# Altium PCB OSPLC2_2_IO.PcbDoc (part 2 of 2)
Units mm, origin at the board's own origin, x right, y up, seen from the top; angles counter-clockwise.
Board outline 156 x 86.5 mm, 2 copper layers (Top Layer, Bottom Layer); 296 components, 258 nets, 890 pads, 194 vias.
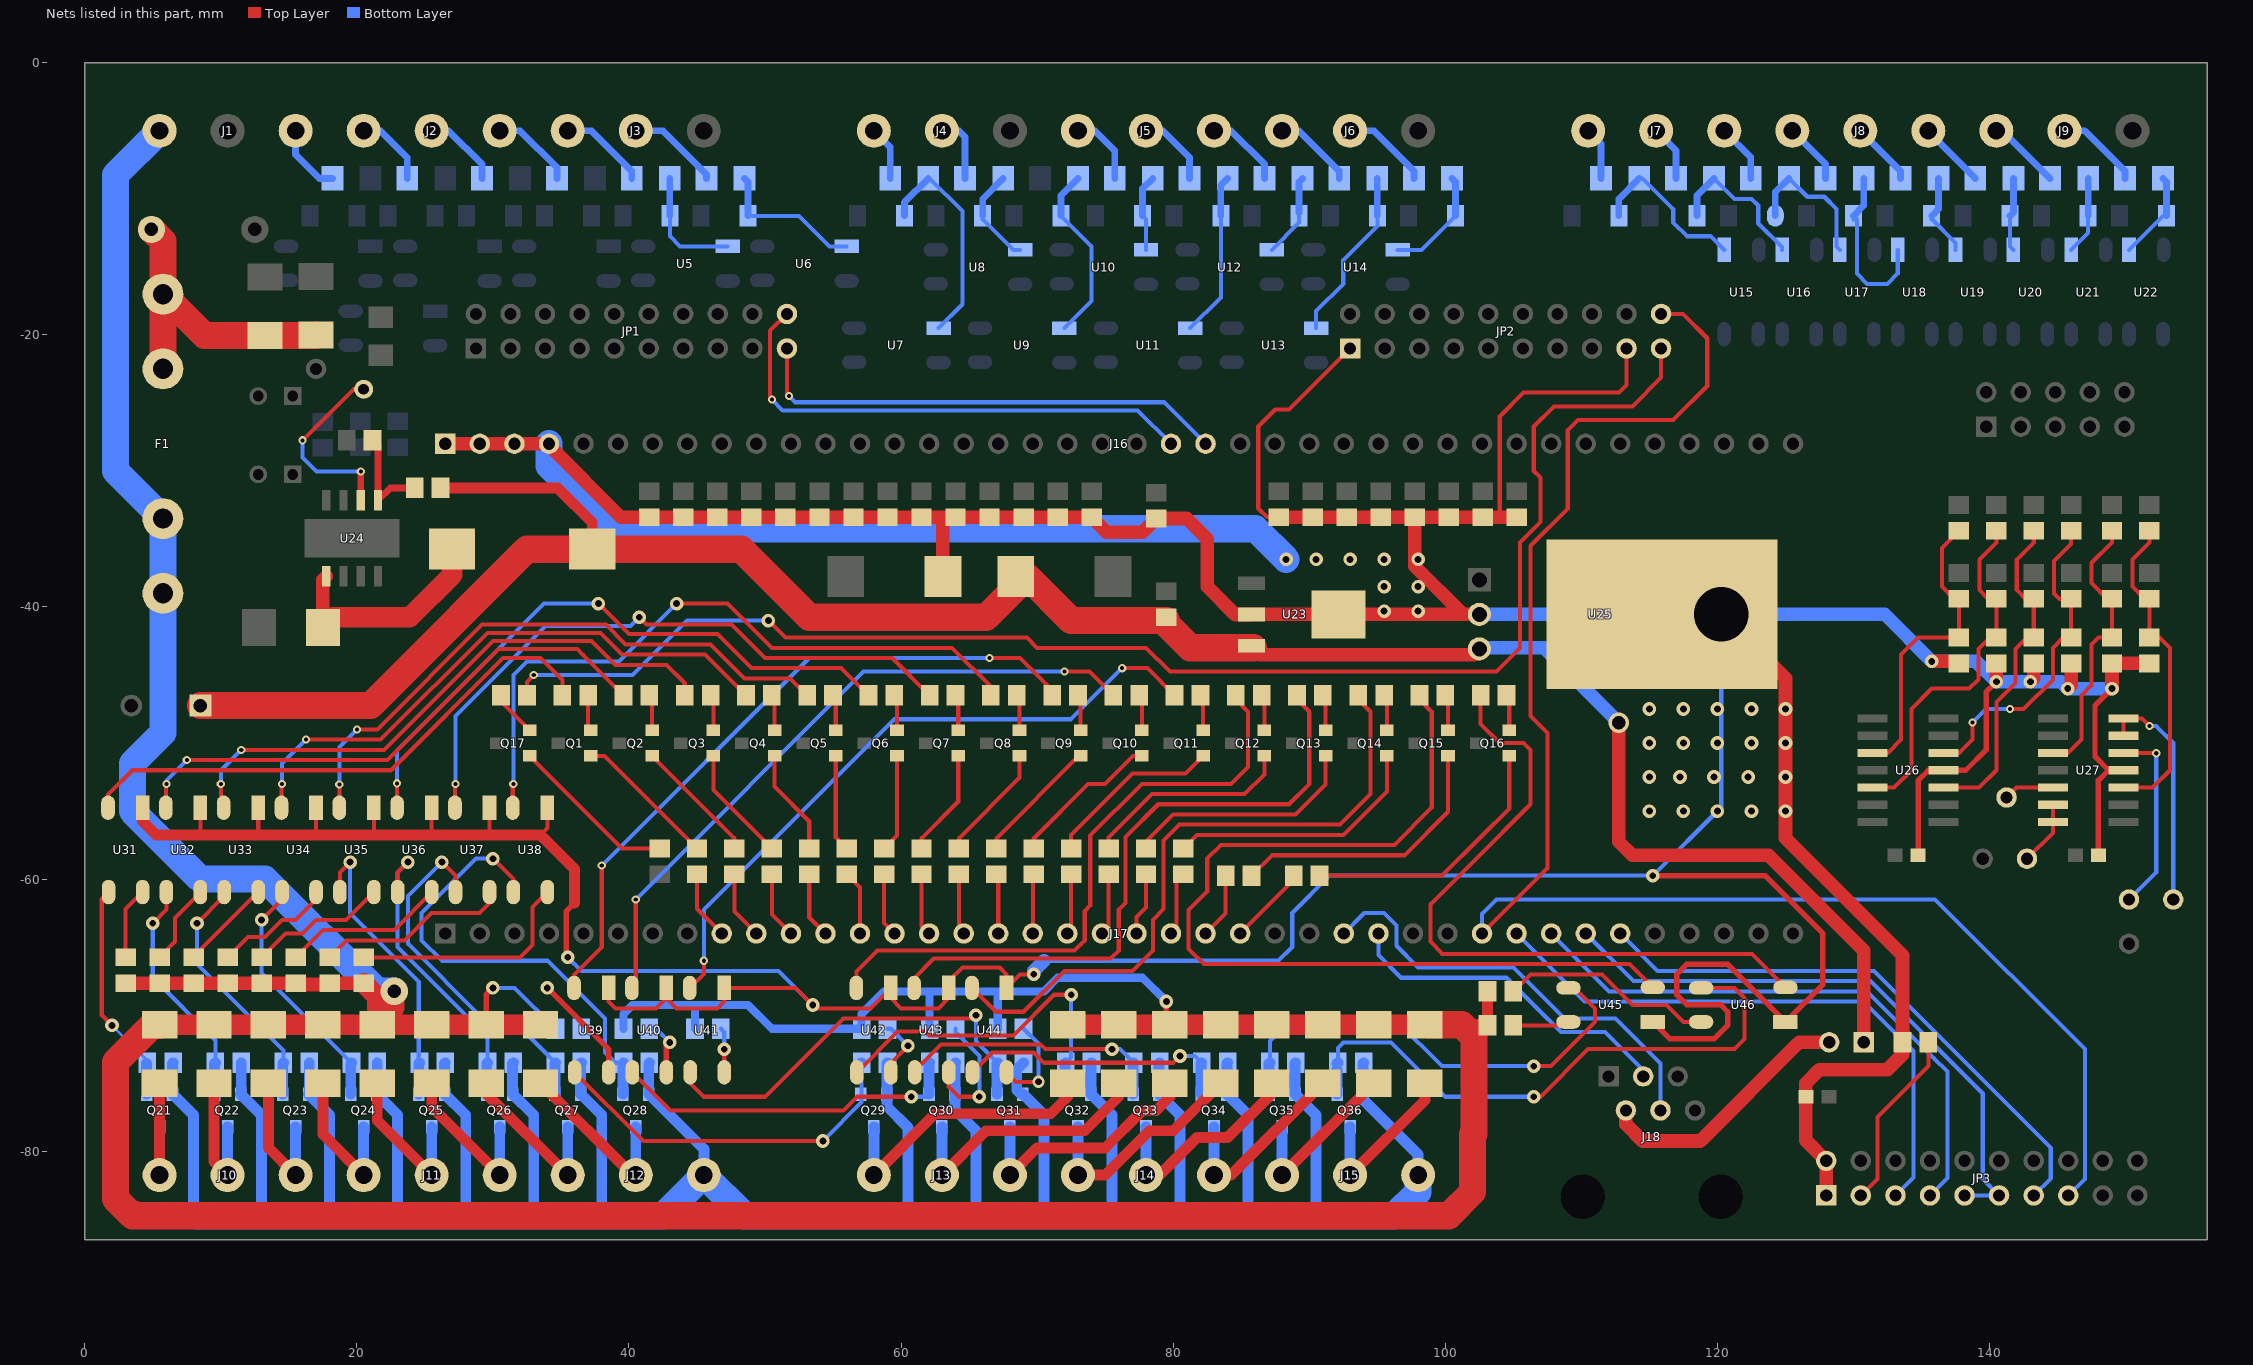
[diagram p2: the nets of this part, all layers, seen from the top]

## Via types
v1: diameter 1, hole 0.5, Top Layer to Bottom Layer, 134 vias
v2: diameter 0.6, hole 0.3, Top Layer to Bottom Layer, 44 vias
v3: diameter 0.9, hole 0.5, Top Layer to Bottom Layer, 8 vias
v4: diameter 1.5, hole 1, Top Layer to Bottom Layer, 6 vias
v5: diameter 1.2, hole 0.6, Top Layer to Bottom Layer, 1 vias
v6: diameter 2, hole 1, Top Layer to Bottom Layer, 1 vias

## Nets (pads, with @x,y where several pads share a name; then routed paths per layer and width w, separated by ;. In a path a pad name is that pad's centre, name@x,y a point inside that pad or via, vN(x,y) a via of type N, cw(c..) or ccw(c..) an arc to the next point about the centre after c; other vN are vias at no path point) (continued)
NetD5_2: D5.2 R5.1 U5.1 | length 8.8
  Bottom Layer w0.3: D5.2@43,-11.25 43,-12.75 43.75,-13.5 U5.1@47.25,-13.5
  Bottom Layer w0.5: D5.2@43,-11.25 R5.1@43,-8.5
NetD6_2: D6.2 R6.1 U6.1 | length 11
  Bottom Layer w0.3: D6.2@48.75,-11.25 52.5,-11.25 54.75,-13.5 U6.1@56,-13.5
  Bottom Layer w0.5: R6.1@48.5,-8.5 48.75,-8.75 D6.2@48.75,-11.25
NetD7_2: D7.2 R7.1 U7.1 | length 16.3
  Bottom Layer w0.3: R7.1@62,-8.5 62.1,-8.5 64.5,-10.9 64.5,-17.75 U7.1@62.75,-19.5
  Bottom Layer w0.5: D7.2@60.25,-11.25 60.25,-10.25 R7.1@62,-8.5
NetD8_2: D8.2 R8.1 U8.1 | length 7.3
  Bottom Layer w0.3: D8.2@66,-11.25 66,-11.5 68.25,-13.75 U8.1@68.75,-13.75
  Bottom Layer w0.5: D8.2@66,-11.25 66,-10 R8.1@67.5,-8.5
NetD9_2: D9.2 R9.1 U9.1 | length 13.3
  Bottom Layer w0.3: D9.2@71.75,-11.25 74,-13.5 74,-17.5 U9.1@72,-19.5
  Bottom Layer w0.5: D9.2@71.75,-11.25 71.75,-9.75 R9.1@73,-8.5
NetD10_2: D10.2 R10.1 U10.1 | length 5.7
  Bottom Layer w0.3: D10.2@77.75,-11.25 78,-11.5 U10.1@78,-13.75
  Bottom Layer w0.5: D10.2@77.75,-11.25 77.75,-9.25 R10.1@78.5,-8.5
NetD11_2: D11.2 R11.1 U11.1 | length 12.1
  Bottom Layer w0.3: U11.1@81.25,-19.5 83.5,-17.25 D11.2@83.5,-11.25
  Bottom Layer w0.5: D11.2@83.5,-11.25 83.5,-9 R11.1@84,-8.5
NetD12_2: D12.2 R12.1 U12.1 | length 6.2
  Bottom Layer w0.3: U12.1@87.25,-13.75 89.25,-11.75 D12.2@89.25,-11
  Bottom Layer w0.5: D12.2@89.25,-11 89.25,-8.75 R12.1@89.5,-8.5
NetD13_2: D13.2 R13.1 U13.1 | length 12.9
  Bottom Layer w0.3: U13.1@90.5,-19.5 90.5,-18.25 92.5,-16.25 92.5,-14.5 95,-12 D13.2@95,-11.25
  Bottom Layer w0.5: D13.2@95,-11.25 R13.1@95,-8.5
NetD14_2: D14.2 R14.1 U14.1 | length 8.1
  Bottom Layer w0.3: U14.1@96.5,-13.75 98.25,-13.75 D14.2@100.75,-11.25
  Bottom Layer w0.5: R14.1@100.5,-8.5 100.75,-8.75 D14.2@100.75,-11.25
NetD15_2: D15.2 R15.1 U15.1 | length 12.4
  Bottom Layer w0.3: R15.1@114.25,-8.5 114.5,-8.5 116.75,-10.75 116.75,-11.75 117.75,-12.75 119.5,-12.75 U15.1@120.5,-13.75
  Bottom Layer w0.5: D15.2@112.75,-11.25 112.75,-10 R15.1@114.25,-8.5
NetD16_2: D16.2 R16.1 U16.1 | length 11.3
  Bottom Layer w0.3: R16.1@119.75,-8.5 121.25,-10 122.5,-10 123,-10.5 123,-11.8 124.75,-13.55 U16.1@124.75,-13.75
  Bottom Layer w0.5: D16.2@118.5,-11.25 118.5,-9.75 R16.1@119.75,-8.5
NetD17_2: D17.2 R17.1 U17.1 | length 10.7
  Bottom Layer w0.3: R17.1@125.25,-8.5 126.6,-9.85 127.85,-9.85 128.75,-10.75 128.75,-13.5 U17.1@129,-13.75
  Bottom Layer w0.5: D17.2@124.25,-11.25 124.25,-9.5 R17.1@125.25,-8.5
NetD18_2: D18.2 R18.1 U18.1 | length 13
  Bottom Layer w0.3: D18.2@130,-11.5 D18.2@130,-11.25 130.25,-11.5 130.25,-15.5 131,-16.25 132.5,-16.25 133.25,-15.5 U18.1@133.25,-13.75
  Bottom Layer w0.5: D18.2@130,-11.25 130.75,-10.5 R18.1@130.75,-8.5
NetD19_2: D19.2 R19.1 U19.1 | length 6.2
  Bottom Layer w0.3: D19.2@135.75,-11.25 135.75,-11.5 137.5,-13.25 U19.1@137.5,-13.75
  Bottom Layer w0.5: D19.2@135.75,-11.25 136.25,-10.75 R19.1@136.25,-8.5
NetD20_2: D20.2 R20.1 U20.1 | length 5.5
  Bottom Layer w0.3: D20.2@141.5,-11.25 141.5,-13.5 U20.1@141.75,-13.75
  Bottom Layer w0.5: D20.2@141.5,-11.25 141.75,-11 R20.1@141.75,-8.5
NetD21_2: D21.2 R21.1 U21.1 | length 5.8
  Bottom Layer w0.3: U21.1@146,-13.75 147.25,-12.5 D21.2@147.25,-11.25
  Bottom Layer w0.5: D21.2@147.25,-11.25 R21.1@147.25,-8.5
NetD22_2: D22.2 R22.1 U22.1 | length 6.6
  Bottom Layer w0.3: U22.1@150.25,-13.75 152.75,-11.25 D22.2@153,-11.25
  Bottom Layer w0.5: R22.1@152.75,-8.5 153,-8.75 D22.2@153,-11.25
NetD23_1: D23.1 D24.2 F1.2 F1.4 M1.2 | length 23.1
  Top Layer w2: M1.2@4.9,-12.25 5.75,-13.1 F1.4@5.75,-22.5 ; F1.2@5.75,-17 8.8,-20.05 16.95,-20.05 D23.1@17,-20
NetD25_1: D25.1 L1.1 U24.1 | length 17.2
  Top Layer w0.5: D25.1@17.5,-41.5 D25.1@17.75,-41.25
  Top Layer w1: D25.1@17.5,-41.5 17.5,-38 U24.1@17.75,-37.75
  Top Layer w1.5: D25.1@17.5,-41.5 18.25,-40.75 23.9,-40.75 27,-37.65 L1.1@27,-35.75
NetJ1_1: J1.1 R1.2 | length 5.2
  Bottom Layer w0.5: J1.1@15.5,-5 15.5,-6.75 17.25,-8.5 R1.2@18.2,-8.5
NetJ2_1: J2.1 R4.2 | length 6.1
  Bottom Layer w0.5: J2.1@30.5,-5 32,-5 34.7,-7.7 R4.2@34.7,-8.5
NetJ2_2: J2.2 R3.2 | length 5.8
  Bottom Layer w0.5: J2.2@25.5,-5 26.75,-5 29.2,-7.45 R3.2@29.2,-8.5
NetJ2_3: J2.3 R2.2 | length 5.6
  Bottom Layer w0.5: J2.3@20.5,-5 21.75,-5 23.7,-6.95 R2.2@23.7,-8.5
NetJ3_2: J3.2 R6.2 | length 6.8
  Bottom Layer w0.5: J3.2@40.5,-5 42.5,-5 45.7,-8.2 R6.2@45.7,-8.5
NetJ3_3: J3.3 R5.2 | length 6.5
  Bottom Layer w0.5: J3.3@35.5,-5 37.25,-5 40.2,-7.95 R5.2@40.2,-8.5
NetJ4_2: J4.2 R8.2 | length 4.9
  Bottom Layer w0.5: J4.2@63,-5 64.25,-5 64.7,-5.45 R8.2@64.7,-8.5
NetJ4_3: J4.3 R7.2 | length 4
  Bottom Layer w0.5: J4.3@58,-5 59.2,-6.2 R7.2@59.2,-8.5
NetJ5_1: J5.1 R12.2 | length 5.8
  Bottom Layer w0.5: J5.1@83,-5 84.25,-5 86.7,-7.45 R12.2@86.7,-8.5
NetJ5_2: J5.2 R11.2 | length 5.6
  Bottom Layer w0.5: J5.2@78,-5 79.25,-5 81.2,-6.95 R11.2@81.2,-8.5
NetJ5_3: J5.3 R10.2 | length 5.4
  Bottom Layer w0.5: J5.3@73,-5 74.25,-5 75.7,-6.45 R10.2@75.7,-8.5
NetJ6_2: J6.2 R14.2 | length 6.5
  Bottom Layer w0.5: J6.2@93,-5 94.75,-5 97.7,-7.95 R14.2@97.7,-8.5
NetJ6_3: J6.3 R13.2 | length 6
  Bottom Layer w0.5: J6.3@88,-5 89.25,-5 92.2,-7.95 R13.2@92.2,-8.5
NetJ7_1: J7.1 R17.2 | length 4.3
  Bottom Layer w0.5: J7.1@120.5,-5 122.45,-6.95 R17.2@122.45,-8.5
NetJ7_2: J7.2 R16.2 | length 4.1
  Bottom Layer w0.5: J7.2@115.5,-5 116.95,-6.45 R16.2@116.95,-8.5
NetJ7_3: J7.3 R15.2 | length 3.9
  Bottom Layer w0.5: J7.3@110.5,-5 111.45,-5.95 R15.2@111.45,-8.5
NetJ8_1: J8.1 R20.2 | length 4.9
  Bottom Layer w0.5: J8.1@135.5,-5 135.5,-5.05 R20.2@138.95,-8.5
NetJ8_2: J8.2 R19.2 | length 4.7
  Bottom Layer w0.5: J8.2@130.5,-5 133.45,-7.95 R19.2@133.45,-8.5
NetJ8_3: J8.3 R18.2 | length 4.5
  Bottom Layer w0.5: J8.3@125.5,-5 127.95,-7.45 R18.2@127.95,-8.5
NetJ9_2: J9.2 R22.2 | length 6.2
  Bottom Layer w0.5: J9.2@145.5,-5 147,-5 149.95,-7.95 R22.2@149.95,-8.5
NetJ9_3: J9.3 R21.2 | length 5.4
  Bottom Layer w0.5: J9.3@140.5,-5 140.95,-5 R21.2@144.45,-8.5
NetJ18_1: 
NetJ18_2: J18.2 JP4.2 | length 19.5
  Top Layer w1: J18.2@113.27,-77 113.27,-78.02 114.5,-79.25 118.75,-79.25 126,-72 JP4.2@128.21,-72
NetJ18_6: 
NetJP3_3: JP3.3 R27.1 | length 13.3
  Top Layer w0.3: JP3.3@130.54,-83.25 131.75,-82.04 131.75,-77.5 135.5,-73.75 R27.1@135.5,-72
NetJP3_17: 
NetJP3_19: 
NetQ1_1: Q1.1 R61.1 | length 10.6
  Top Layer w0.3: Q1.1@37.2,-50.95 38.2,-50.95 R61.1@45,-57.75
NetQ1_2: Q1.2 R121.1 | length 2.6
  Top Layer w0.3: R121.1@37,-46.5 37,-48.85 Q1.2@37.2,-49.05
NetQ2_1: Q2.1 R62.1 | length 9.3
  Top Layer w0.3: Q2.1@41.7,-50.95 47.75,-57 R62.1@47.75,-57.75
NetQ2_2: Q2.2 R122.1 | length 2.6
  Top Layer w0.3: R122.1@41.5,-46.5 41.7,-46.7 Q2.2@41.7,-49.05
NetQ3_1: Q3.1 R63.1 | length 8.6
  Top Layer w0.3: Q3.1@46.2,-50.95 46.2,-53.45 R63.1@50.5,-57.75
NetQ3_2: Q3.2 R123.1 | length 2.6
  Top Layer w0.3: R123.1@46,-46.5 46.2,-46.7 Q3.2@46.2,-49.05
NetQ4_1: Q4.1 R64.1 | length 7.9
  Top Layer w0.3: Q4.1@50.7,-50.95 50.7,-53.2 53.25,-55.75 R64.1@53.25,-57.75
NetQ4_2: Q4.2 R124.1 | length 2.6
  Top Layer w0.3: R124.1@50.5,-46.5 50.7,-46.7 Q4.2@50.7,-49.05
NetQ5_1: Q5.1 R65.1 | length 7.1
  Top Layer w0.3: Q5.1@55.2,-50.95 55.2,-56.95 R65.1@56,-57.75
NetQ5_2: Q5.2 R125.1 | length 2.6
  Top Layer w0.3: R125.1@55,-46.5 55.2,-46.7 Q5.2@55.2,-49.05
NetQ6_1: Q6.1 R66.1 | length 7.2
  Top Layer w0.3: R66.1@58.75,-57.75 59.7,-56.8 Q6.1@59.7,-50.95
NetQ6_2: Q6.2 R126.1 | length 2.6
  Top Layer w0.3: R126.1@59.5,-46.5 59.7,-46.7 Q6.2@59.7,-49.05
NetQ7_1: Q7.1 R67.1 | length 7.9
  Top Layer w0.3: R67.1@61.5,-57.75 61.5,-57 64.2,-54.3 Q7.1@64.2,-50.95
NetQ7_2: Q7.2 R127.1 | length 2.6
  Top Layer w0.3: R127.1@64,-46.5 64.2,-46.7 Q7.2@64.2,-49.05
NetQ8_1: Q8.1 R68.1 | length 8.6
  Top Layer w0.3: R68.1@64.25,-57.75 64.25,-57 68.7,-52.55 Q8.1@68.7,-50.95
NetQ8_2: Q8.2 R128.1 | length 2.6
  Top Layer w0.3: R128.1@68.5,-46.5 68.7,-46.7 Q8.2@68.7,-49.05
NetQ9_1: Q9.1 R69.1 | length 9.7
  Top Layer w0.3: R69.1@67,-57.75 67,-57 73,-51 Q9.1@73.5,-51
NetQ9_2: Q9.2 R129.1 | length 2.6
  Top Layer w0.3: R129.1@73,-46.5 73.2,-46.7 Q9.2@73.2,-49.05
NetQ10_1: Q10.1 R70.1 | length 11.2
  Top Layer w0.3: R70.1@69.75,-57.75 69.75,-57 73.75,-53 75,-53 77.05,-50.95 Q10.1@77.7,-50.95
NetQ10_2: Q10.2 R130.1 | length 2.6
  Top Layer w0.3: R130.1@77.5,-46.5 77.7,-46.7 Q10.2@77.7,-49.05
NetQ11_1: Q11.1 R71.1 | length 13.1
  Top Layer w0.3: R71.1@72.5,-57.75 72.5,-56.75 77,-52.25 80.9,-52.25 Q11.1@82.2,-50.95
NetQ11_2: Q11.2 R131.1 | length 2.6
  Top Layer w0.3: R131.1@82,-46.5 82.2,-46.7 Q11.2@82.2,-49.05
NetQ12_1: Q12.1 R72.1 | length 15.5
  Top Layer w0.3: R72.1@75.25,-57.75 75.25,-56.95 78.45,-53.75 85.25,-53.75 86.7,-52.3 Q12.1@86.7,-50.95
NetQ12_2: Q12.2 R132.1 | length 2.6
  Top Layer w0.3: R132.1@86.5,-46.5 86.7,-46.7 Q12.2@86.7,-49.05
NetQ13_1: Q13.1 R73.1 | length 17.5
  Top Layer w0.3: R73.1@78,-57.75 78,-57.25 80,-55.25 89,-55.25 91.2,-53.05 Q13.1@91.2,-50.95
NetQ13_2: Q13.2 R133.1 | length 2.6
  Top Layer w0.3: R133.1@91,-46.5 91.2,-46.7 Q13.2@91.2,-49.05
NetQ14_1: Q14.1 R74.1 | length 19.3
  Top Layer w0.3: R74.1@80.75,-57.75 81.75,-56.75 92.5,-56.75 95.7,-53.55 Q14.1@95.7,-50.95
NetQ14_2: Q14.2 R134.1 | length 2.6
  Top Layer w0.3: R134.1@95.5,-46.5 95.7,-46.7 Q14.2@95.7,-49.05
NetQ15_1: Q15.1 R75.1 | length 20.5
  Top Layer w0.3: R75.1@85.75,-59.75 87.25,-58.25 97,-58.25 100.2,-55.05 Q15.1@100.2,-50.95
NetQ15_2: Q15.2 R135.1 | length 2.6
  Top Layer w0.3: R135.1@100,-46.5 100.2,-46.7 Q15.2@100.2,-49.05
NetQ16_1: Q16.1 R76.1 | length 21.1
  Top Layer w0.3: R76.1@90.75,-59.75 99.75,-59.75 102.602,-56.898 ; 101.75,-57.75 102.602,-56.898 ; Q16.1@104.7,-50.95 104.7,-54.8 102.602,-56.898
NetQ16_2: Q16.2 R136.1 | length 2.6
  Top Layer w0.3: R136.1@104.5,-46.5 104.7,-46.7 Q16.2@104.7,-49.05
NetQ17_1: Q17.1 R29.1 | length 12.4
  Top Layer w0.3: Q17.1@32.7,-50.95 39.5,-57.75 R29.1@42.25,-57.75
NetQ17_2: Q17.2 R28.2 | length 3.4
  Top Layer w0.3: R28.2@30.6,-46.5 30.6,-46.95 Q17.2@32.7,-49.05
NetQ21_1: Q21.1 R101.2 U31.4 | length 16.5
  Top Layer w0.3: U31.4@1.75,-60.95 1.25,-61.45 1.25,-70 v1(2,-70.75)
  Bottom Layer w0.2: v1(2,-70.75) 4.6,-73.35 R101.2@4.6,-73.5 R101.2@4.55,-73.55
  Bottom Layer w0.8: Q21.1@4.55,-75.8 R101.2@4.55,-73.55
NetQ22_1: Q22.1 R102.2 U32.4 | length 17.2
  Top Layer w0.3: v1(5,-63.25) 6,-62.25 U32.4@6,-60.95
  Bottom Layer w0.3: v1(5,-63.25) 5,-67.25 9.6,-71.85 R102.2@9.6,-73.5
  Bottom Layer w0.8: Q22.1@9.55,-75.8 9.55,-73.55 R102.2@9.6,-73.5
NetQ23_1: Q23.1 R103.2 U33.4 | length 18.3
  Top Layer w0.3: v1(8.25,-63.25) 10.25,-61.25 U33.4@10.25,-60.95
  Bottom Layer w0.3: v1(8.25,-63.25) 8.25,-66.25 14.6,-72.6 R103.2@14.6,-73.5
  Bottom Layer w0.8: Q23.1@14.55,-75.8 14.55,-73.55 R103.2@14.6,-73.5
NetQ24_1: Q24.1 R104.2 U34.4 | length 18.2
  Top Layer w0.3: v1(13,-63) 14.5,-61.5 U34.4@14.5,-60.95
  Bottom Layer w0.3: v1(13,-63) 13,-66.9 R104.2@19.6,-73.5
  Bottom Layer w0.8: Q24.1@19.55,-75.8 19.55,-73.55 R104.2@19.6,-73.5
NetQ25_1: Q25.1 R105.2 U35.4 | length 21.7
  Top Layer w0.3: U35.4@18.75,-60.95 18.75,-59.5 v1(19.5,-58.75)
  Bottom Layer w0.3: v1(19.5,-58.75) 19.5,-62.5 24.55,-67.55 R105.2@24.55,-73.55
  Bottom Layer w0.8: Q25.1@24.55,-75.8 24.55,-73.55 R105.2@24.6,-73.5
NetQ26_1: Q26.1 R106.2 U36.4 | length 22.7
  Top Layer w0.3: U36.4@23,-60.95 23,-59.5 v1(23.75,-58.75)
  Bottom Layer w0.3: v1(23.75,-58.75) 23,-59.5 23,-65 29.6,-71.6 R106.2@29.6,-73.5 R106.2@29.5,-73.5
  Bottom Layer w0.8: Q26.1@29.55,-75.8 29.55,-73.55 R106.2@29.6,-73.5
NetQ27_1: Q27.1 R107.2 U37.4 | length 26.4
  Top Layer w0.3: v1(26.25,-58.75) 27.25,-59.75 U37.4@27.25,-60.95
  Bottom Layer w0.3: v1(26.25,-58.75) 23.75,-61.25 23.75,-64.75 29.25,-70.25 31.35,-70.25 33.495,-72.395 R107.2@34.6,-73.5
  Bottom Layer w0.8: Q27.1@34.55,-75.8 34.55,-73.55 R107.2@34.6,-73.5
NetQ28_1: Q28.1 R108.2 U38.4 | length 34.3
  Top Layer w0.3: v1(30,-58.5) 31.5,-60 U38.4@31.5,-60.95
  Bottom Layer w0.3: v1(30,-58.5) 28.75,-58.5 24.75,-62.5 24.75,-64.5 26.25,-66 34,-66 38.25,-70.25 38.25,-72.75 39,-73.5 R108.2@39.6,-73.5
  Bottom Layer w0.8: Q28.1@39.55,-75.8 39.55,-73.55 R108.2@39.6,-73.5
NetQ29_1: Q29.1 R109.2 U39.4 | length 27.3
  Top Layer w0.3: U39.4@36,-74.2 41.05,-79.25 v1(54.25,-79.25)
  Bottom Layer w0.3: v1(54.25,-79.25) 57.1,-76.4 R109.2@57.1,-73.5
  Bottom Layer w0.8: R109.2@57.05,-73.55 R109.2@57.1,-73.5
NetQ30_1: Q30.1 R110.2 U40.4 | length 25.8
  Top Layer w0.3: U40.4@40.25,-74.2 43.05,-77 55.75,-77 56.75,-76 v1(60.75,-76)
  Bottom Layer w0.3: v1(60.75,-76) 61.85,-76 Q30.1@62.05,-75.8
  Bottom Layer w0.8: Q30.1@62.05,-75.8 62.05,-73.55 R110.2@62.1,-73.5
NetQ31_1: Q31.1 R111.2 U41.4 | length 32.5
  Top Layer w0.3: U41.4@44.5,-74.2 44.5,-75 45.5,-76 50,-76 53.511,-72.489 55.75,-70.25 65.25,-70.25 v1(65.5,-70)
  Bottom Layer w0.3: v1(65.5,-70) 65.5,-71.9 65.743,-72.143 R111.2@67.1,-73.5 66.175,-72.575
  Bottom Layer w0.8: Q31.1@67.05,-75.8 67.05,-73.55 R111.2@67.1,-73.5
NetQ32_1: Q32.1 R112.2 U42.4 | length 25.9
  Top Layer w0.3: U42.4@56.75,-74.2 59.75,-71.2 61.75,-71.2 62.05,-71.5 68.25,-71.5 71.25,-68.5 v1(72.5,-68.5)
  Bottom Layer w0.3: R112.2@72.05,-73.55 72.05,-73.5 R112.2@72.1,-73.5 72.5,-73.1 v1(72.5,-68.5)
  Bottom Layer w0.8: Q32.1@72.05,-75.8 72.05,-73.55 R112.2@72.1,-73.5
NetQ33_1: Q33.1 R113.2 U43.4 | length 19.9
  Top Layer w0.3: U43.4@61,-74.2 61,-74.1 62.95,-72.15 70.25,-72.15 70.6,-72.5 v1(75.5,-72.5)
  Bottom Layer w0.3: v1(75.5,-72.5) 76.1,-72.5 R113.2@77.1,-73.5
  Bottom Layer w0.8: Q33.1@77.05,-75.8 77.05,-73.55 R113.2@77.1,-73.5
NetQ34_1: Q34.1 R114.2 U44.4 | length 20.5
  Top Layer w0.3: U44.4@65.25,-74.2 66.7,-72.75 69.75,-72.75 70.5,-73.5 80,-73.5 v1(80.5,-73)
  Bottom Layer w0.3: v1(80.5,-73) 81.6,-73 R114.2@82.1,-73.5
  Bottom Layer w0.8: Q34.1@82.05,-75.8 82.05,-73.55 R114.2@82.1,-73.5
NetQ35_1: Q35.1 R115.2 U45.4 | length 34.7
  Top Layer w0.3: v1(106.5,-73.75) 107.75,-73.75 111,-70.5 111,-69.5 109.5,-68 U45.4@109.05,-68
  Bottom Layer w0.3: R115.2@87.1,-73.5 87.1,-71.9 88.5,-70.5 96.5,-70.5 99.75,-73.75 v1(106.5,-73.75)
  Bottom Layer w0.8: Q35.1@87.05,-75.8 87.05,-73.55 R115.2@87.1,-73.5
NetQ36_1: Q36.1 R116.2 U46.4 | length 43
  Top Layer w0.3: v1(106.5,-76) 107,-76 110.5,-72.5 121.25,-72.5 122,-71.75 122,-68.75 121.25,-68 U46.4@118.8,-68
  Bottom Layer w0.3: R116.2@92.1,-73.5 92.1,-72.4 92.5,-72 96,-72 97.929,-73.929 100,-76 v1(106.5,-76)
  Bottom Layer w0.8: Q36.1@92.05,-75.8 R116.2@92.05,-74 ; R116.2@92.05,-73.55 R116.2@92.1,-73.5
NetR24_1: R24.1 R26.2 U24.5 | length 7.6
  Top Layer w0.5: R26.2@21.15,-27.75 21.56,-28.16 U24.5@21.56,-32.15 22.46,-31.25 R24.1@24.25,-31.25
NetR30_1: R30.1 R54.2 R56.2 U26.3 | length 24.8
  Top Layer w0.3: U26.3@136.6,-53.27 139.23,-53.27 140.5,-52 140.5,-47 140.7,-46.8 141.9,-45.6 141.9,-43.1 142.75,-42.25 R30.1@143.25,-42.25 R56.2@143.25,-39.4 142.65,-39.4 142,-38.75 142,-36.525 143.25,-35.275 R54.2@143.25,-34.4
NetR53_1: R53.1 R55.2 R57.2 U26.5 | length 24.4
  Top Layer w0.3: U26.5@136.6,-50.73 137.77,-50.73 138.75,-49.75 v2(138.75,-48.5) ; v2(141.5,-47.5) 142.5,-47.5 144.65,-45.35 144.65,-43 145.4,-42.25 R53.1@146,-42.25 R57.2@146,-39.4 145.15,-39.4 144.75,-39 144.75,-36.625 146,-35.375 R55.2@146,-34.4
  Bottom Layer w0.3: v2(138.75,-48.5) 139.75,-47.5 v2(141.5,-47.5)
NetR58_1: R58.1 R60.2 R78.2 U26.10 | length 22.6
  Top Layer w0.3: U26.10@131.4,-50.73 132.52,-50.73 133.5,-49.75 133.5,-43.5 134.75,-42.25 R58.1@137.75,-42.25 R78.2@137.75,-39.4 137.4,-39.4 136.5,-38.5 136.5,-35.65 R60.2@137.75,-34.4
NetR59_1: R59.1 R77.2 R79.2 U26.12 | length 26.8
  Top Layer w0.3: U26.12@131.4,-53.27 132.98,-53.27 134.25,-52 134.25,-47.5 135.75,-46 138.5,-46 139.175,-45.325 139.175,-43.1 140.025,-42.25 R59.1@140.5,-42.25 R79.2@140.5,-39.4 139.9,-39.4 139.25,-38.75 139.25,-36.5 140.5,-35.25 R77.2@140.5,-34.4
NetR80_1: R80.1 R97.2 R98.2 U27.3 | length 23.6
  Top Layer w0.3: U27.3@149.85,-53.27 151.98,-53.27 153.25,-52 153.25,-43 152.5,-42.25 R80.1@151.75,-42.25 ; R80.1@151.75,-42 R98.2@151.75,-39.4 151.4,-39.4 150.5,-38.5 150.5,-36.5 151.75,-35.25 R97.2@151.75,-34.4
NetR81_1: R81.1 U31.6 | length 5.7
  Top Layer w0.3: R81.1@3,-66 R81.1@3.25,-65.75 ; R81.1@3,-65.75 3,-62.2 U31.6@4.25,-60.95
NetR82_1: R82.1 U32.6 | length 6
  Top Layer w0.3: R82.1@5.5,-65.75 6.647,-64.603 6.647,-62.853 8.5,-61 U32.6@8.5,-60.95
NetR83_1: R83.1 U33.6 | length 7.2
  Top Layer w0.3: R83.1@8,-65.75 R83.1@8,-65.25 ; R83.1@8,-65.7 U33.6@12.75,-60.95
NetR84_1: R84.1 U34.6 | length 8.8
  Top Layer w0.3: R84.1@10.5,-65.75 12,-64.25 13.25,-64.25 14.5,-63 15.5,-63 17,-61.5 U34.6@17,-60.95
NetR85_1: R85.1 U35.6 | length 10.2
  Top Layer w0.3: R85.1@13,-65.75 14.75,-64 16,-64 17,-63 19.2,-63 U35.6@21.25,-60.95
NetR86_1: R86.1 U36.6 | length 12.2
  Top Layer w0.3: R86.1@15.5,-65.75 17.5,-63.75 22.75,-63.75 25.5,-61 U36.6@25.5,-60.95 ; U36.6@25.3,-60.45 U36.6@25.5,-60.45
NetR87_1: R87.1 U37.6 | length 14.2
  Top Layer w0.3: R87.1@18,-65.75 19.25,-64.5 23.5,-64.5 25.5,-62.5 29,-62.5 29.75,-61.75 U37.6@29.75,-60.95
NetR88_1: R88.1 U38.6 | length 17.1
  Top Layer w0.3: R88.1@20.5,-65.75 32,-65.75 32.9,-64.85 32.9,-62.05 U38.6@34,-60.95
NetR89_1: R89.1 U39.6 | length 12.1
  Top Layer w0.4: v1(34,-68) 36.36,-70.36 38.5,-72.5 U39.6@38.5,-74.2
  Bottom Layer w0.3: v1(34,-68) 36.5,-70.5 R89.1@36.5,-71
NetR90_1: R90.1 U40.6 | length 4.2
  Top Layer w0.4: U40.6@42.75,-74.2 42.75,-72.25 v1(43,-72)
  Bottom Layer w0.3: R90.1@41.5,-71 42,-71 v1(43,-72)
NetR91_1: R91.1 U41.6 | length 3.3
  Top Layer w0.3: U41.6@47,-74.2 v1(47,-72.5)
  Bottom Layer w0.3: R91.1@46.75,-71 47,-71.25 v1(47,-72.5)
NetR92_1: R92.1 U42.6 | length 4.5
  Top Layer w0.3: U42.6@59.25,-74.2 59.25,-73.5 v1(60.5,-72.25)
  Bottom Layer w0.3: R92.1@59,-71 59.25,-71 v1(60.5,-72.25)
NetR93_1: R93.1 U43.6 | length 9.3
  Top Layer w0.3: U43.6@63.5,-74.2 63.5,-75.25 64.25,-76 v1(65.75,-76)
  Bottom Layer w0.3: R93.1@64,-71 64,-71.25 65.75,-73 v1(65.75,-76)
NetR94_1: R94.1 U44.6 | length 7
  Top Layer w0.3: U44.6@67.75,-74.2 68.45,-74.9 v3(70.1,-74.9)
  Bottom Layer w0.3: R94.1@69,-71 70.1,-72.1 v3(70.1,-74.9)
NetR95_1: R95.1 U45.6 | length 4.2
  Top Layer w0.3: R95.1@105,-70.75 108.8,-70.75 U45.6@109.05,-70.5
NetR96_1: R96.1 U46.6 | length 15.8
  Top Layer w0.3: R96.1@105,-68.25 106.25,-67 111.5,-67 113.75,-69.25 116.25,-69.25 117.5,-70.5 U46.6@118.8,-70.5
NetR99_1: R99.1 R100.2 R117.2 U27.10 | length 20.6
  Top Layer w0.3: U27.10@144.65,-50.73 145.77,-50.73 146.75,-49.75 146.75,-46.5 147.5,-45.75 147.5,-42.75 148,-42.25 R99.1@149,-42.25 ; R99.1@149,-42 R117.2@149,-39.4 148.65,-39.4 147.5,-38.25 147.5,-36.75 149,-35.25 R100.2@149,-34.4
NetR121_2: R121.2 U31.3 | length 40.3
  Top Layer w0.3: U31.3@1.71,-54.75 1.71,-53.79 3.5,-52 22.5,-52 30.75,-43.75 33.5,-43.75 35.1,-45.35 R121.2@35.1,-46.5
NetR122_2: R122.2 U32.3 | length 41.1
  Top Layer w0.3: U32.3@6,-54.71 U32.3@5.96,-54.75 5.96,-53.04 v2(6,-53) ; v2(7.5,-51.25) 22.25,-51.25 30.4,-43.1 36.2,-43.1 36.6,-43.5 R122.2@39.6,-46.5
  Bottom Layer w0.3: v2(6,-53) 6,-52.75 v2(7.5,-51.25)
NetR123_2: R123.2 U33.3 | length 43.1
  Top Layer w0.3: v2(10,-53) 10,-54.54 U33.3@10.21,-54.75 ; v2(11.5,-50.5) 22,-50.5 30,-42.5 37.25,-42.5 39,-44.25 42.75,-44.25 44.1,-45.6 R123.2@44.1,-46.5
  Bottom Layer w0.3: v2(10,-53) 10,-52 v2(11.5,-50.5)
NetR124_2: R124.2 U34.3 | length 43.3
  Top Layer w0.3: U34.3@14.5,-54.71 U34.3@14.46,-54.75 14.46,-53.04 v2(14.5,-53) ; v2(16.25,-49.75) 21.75,-49.75 29.6,-41.9 37.9,-41.9 39.5,-43.5 45.6,-43.5 R124.2@48.6,-46.5
  Bottom Layer w0.3: v2(14.5,-53) 14.5,-51.5 v2(16.25,-49.75)
NetR125_2: R125.2 U35.3 | length 44.9
  Top Layer w0.3: U35.3@18.605,-54.855 U35.3@18.75,-55 ; U35.3@18.71,-54.75 v2(18.71,-53.04) ; v2(20,-49) 21.5,-49 29.2,-41.3 38.3,-41.3 39.75,-42.75 46,-42.75 48.5,-45.25 51.85,-45.25 R125.2@53.1,-46.5
  Bottom Layer w0.3: v2(18.71,-53.04) 18.71,-50.29 v2(20,-49)
NetR126_2: R126.2 U36.3 | length 46.1
  Top Layer w0.3: U36.3@22.96,-54.75 v2(22.96,-52.96) ; v1(37.75,-39.75) 40,-42 46.5,-42 49,-44.5 55.6,-44.5 R126.2@57.6,-46.5
  Bottom Layer w0.3: v2(22.96,-52.96) 22.96,-50.54 33.75,-39.75 v1(37.75,-39.75)
NetR127_2: R127.2 U37.3 | length 46.9
  Top Layer w0.3: U37.3@27.21,-54.75 v2@27.21,-53.04 ; v1(40.75,-40.75) 41.3,-41.3 47.55,-41.3 50,-43.75 59.35,-43.75 R127.2@62.1,-46.5
  Bottom Layer w0.3: v2(27.25,-53) 27.25,-48 33.85,-41.4 40.1,-41.4 v1(40.75,-40.75)
NetR128_2: R128.2 U38.3 | length 50.2
  Top Layer w0.3: v2@31.46,-53.04 U38.3@31.46,-54.75 U38.3@31.5,-54.71 ; v1(43.5,-39.75) 47.25,-39.75 50.5,-43 63.75,-43 66.6,-45.85 R128.2@66.6,-46.5
  Bottom Layer w0.3: v2(31.5,-53) 31.5,-45 32.5,-44 39.25,-44 v1(43.5,-39.75)
NetR129_2: R129.2 U39.3 | length 50.6
  Top Layer w0.3: U39.3@35.96,-68 35.96,-67.04 38,-65 v2(38,-59) ; v2(66.5,-43.75) 68.75,-43.75 71.1,-46.1 R129.2@71.1,-46.5
  Bottom Layer w0.3: v2(38,-59) 53.25,-43.75 v2(66.5,-43.75)
NetR130_2: R130.2 U40.3 | length 49.4
  Top Layer w0.3: U40.3@40.21,-68 40.5,-67.71 v2(40.5,-61.5) ; v2(72,-44.75) 73.85,-44.75 R130.2@75.6,-46.5
  Bottom Layer w0.3: v2(40.5,-61.5) 57.25,-44.75 v2(72,-44.75)
NetR131_2: R131.2 U41.3 | length 49
  Top Layer w0.3: U41.3@44.46,-68 45.5,-66.96 v2(45.5,-66) ; v2(76.25,-44.5) 78.1,-44.5 R131.2@80.1,-46.5
  Bottom Layer w0.3: v2(45.5,-66) 45.5,-62.25 59.5,-48.25 72.5,-48.25 v2(76.25,-44.5)
NetR132_2: R132.2 U42.3 | length 46.1
  Top Layer w0.3: U42.3@56.71,-68 56.71,-66.79 58.25,-65.25 72.75,-65.25 73.25,-64.75 73.5,-64.5 73.5,-62.35 73.9,-61.95 73.9,-56.8 77.7,-53 84.25,-53 85.5,-51.75 85.5,-47.7 84.6,-46.8 R132.2@84.6,-46.5
NetR133_2: R133.2 U43.3 | length 46.8
  Top Layer w0.3: U43.3@60.96,-68 60.96,-67.29 62.4,-65.85 75.4,-65.85 76,-65.25 76,-62.25 76.5,-61.75 76.5,-56.9 78.9,-54.5 88.5,-54.5 90,-53 90,-47.7 R133.2@89.1,-46.8
NetR134_2: R134.2 U44.3 | length 48.2
  Top Layer w0.3: U44.3@65.21,-68 66.96,-69.75 69,-69.75 72,-66.75 77,-66.75 78.5,-65.25 78.5,-63 79.3,-62.2 79.3,-57.157 80.457,-56 92.25,-56 94.5,-53.75 94.5,-47.7 R134.2@93.6,-46.8
NetR135_2: R135.2 U45.3 | length 68.9
  Top Layer w0.3: R135.2@98.1,-46.8 99,-47.7 99,-54.75 96.25,-57.5 83.5,-57.5 82.5,-58.5 82.5,-60.9 81.125,-62.275 81.125,-65.125 82.25,-66.25 113.54,-66.25 U45.3@115.25,-67.96
NetR136_2: R136.2 U46.3 | length 51.2
  Top Layer w0.3: 99.75,-65.5 122.54,-65.5 U46.3@125,-67.96 ; 99.8,-65.5 98.9,-64.6 98.9,-61.85 102.168,-58.582 106.25,-54.5 106.25,-50.5 105.75,-50 104,-50 102.6,-48.6 R136.2@102.6,-46.5
NetTP2_1: TP2.1 U24.6 | length 14.1
  Top Layer w0.3: v2(16,-27.75) 19.75,-24 TP2.1@20.5,-24
  Top Layer w0.5: U24.6@20.29,-32.15 v2(20.29,-30.04)
  Bottom Layer w0.3: v2(16,-27.75) 16,-29 17.04,-30.04 v2(20.29,-30.04)
NetTP3_1: TP3.1 U27.6 U27.7 | length 17.2
  Top Layer w0.3: U27.6@149.85,-49.46 U27.7@149.85,-48.19 151.19,-48.19 v2(151.75,-48.75)
  Bottom Layer w0.3: v2(151.75,-48.75) 152.25,-48.75 153.5,-50 TP3.1@153.5,-61.5
NetTP4_1: TP4.1 U27.5 | length 14
  Top Layer w0.3: U27.5@149.85,-50.73 152.23,-50.73 v2(152.25,-50.75)
  Bottom Layer w0.3: TP4.1@150.25,-61.5 152.25,-59.5 v2(152.25,-50.75)
NetTP6_1: TP6.1 U27.13 U27.14 | length 4.7
  Top Layer w0.3: TP6.1@142.75,-58.5 144.65,-56.6 U27.13@144.65,-54.54
NetTP7_1: TP7.1 U27.12 | length 3.7
  Top Layer w0.3: TP7.1@141.25,-54 141.98,-53.27 U27.12@144.65,-53.27
NetU24_2: 
NRST: J17.31 JP2.20 JP3.15 | length 121.9
  Top Layer w0.3: J17.31@102.7,-64 107.5,-59.2 107.5,-49.25 106.25,-48 106.25,-35.5 109,-32.75 109,-27 109.75,-26.25 116.75,-26.25 119.25,-23.75 119.25,-20.25 117.46,-18.46 JP2.20@115.86,-18.46
  Bottom Layer w0.3: J17.31@102.7,-64 102.7,-62.55 103.75,-61.5 136,-61.5 147,-72.5 147,-82.03 JP3.15@145.78,-83.25
O1: J17.9 R61.2 | length 5.1
  Top Layer w0.3: R61.2@45,-59.65 45,-62.18 J17.9@46.82,-64
O2: J17.10 R62.2 | length 5
  Top Layer w0.3: R62.2@47.75,-59.65 47.75,-62.39 J17.10@49.36,-64
O3: J17.11 R63.2 | length 4.9
  Top Layer w0.3: R63.2@50.5,-59.65 50.5,-62.6 J17.11@51.9,-64
O4: J17.12 R64.2 | length 4.8
  Top Layer w0.3: R64.2@53.25,-59.65 53.25,-62.81 J17.12@54.44,-64
O5: J17.13 R65.2 | length 4.9
  Top Layer w0.3: R65.2@56,-59.5 R65.2@56,-59.65 56.98,-60.63 J17.13@56.98,-64
O6: J17.14 R66.2 | length 4.7
  Top Layer w0.3: R66.2@58.75,-59.65 58.75,-63.23 J17.14@59.52,-64
O7: J17.15 R67.2 | length 4.6
  Top Layer w0.3: R67.2@61.5,-59.65 61.5,-63.44 J17.15@62.06,-64
O8: J17.16 R68.2 | length 4.5
  Top Layer w0.3: R68.2@64.25,-59.65 64.25,-63.65 J17.16@64.6,-64
O9: J17.17 R69.2 | length 4.4
  Top Layer w0.3: R69.2@67,-59.65 67.14,-59.79 J17.17@67.14,-64
O10: J17.18 R70.2 | length 4.4
  Top Layer w0.3: J17.18@69.68,-64 69.68,-59.72 R70.2@69.75,-59.65
O11: J17.19 R71.2 | length 4.5
  Top Layer w0.3: J17.19@72.22,-64 72.5,-63.72 R71.2@72.5,-59.65
O12: J17.20 R72.2 | length 4.6
  Top Layer w0.3: J17.20@74.76,-64 75.25,-63.51 R72.2@75.25,-59.65
O13: J17.21 R73.2 | length 4.6
  Top Layer w0.3: J17.21@77.3,-64 77.3,-62.8 78,-62.1 R73.2@78,-59.65
O14: J17.22 R74.2 | length 4.7
  Top Layer w0.3: J17.22@79.84,-64 80.25,-63.59 80.25,-60.15 R74.2@80.75,-59.65
O15: J17.23 R75.2 | length 4.9
  Top Layer w0.3: J17.23@82.38,-64 83.85,-62.53 R75.2@83.85,-59.75
O16: J17.24 R76.2 | length 5.9
  Top Layer w0.3: J17.24@84.92,-64 88.85,-60.07 R76.2@88.85,-59.75
OUT_1: D61.1 J10.1 Q21.3 | length 10.3
  Top Layer w0.8: J10.1@5.5,-81.75 D61.1@5.5,-75
  Bottom Layer w0.8: J10.1@5.5,-81.75 Q21.3@5.5,-78.2
OUT_2: D62.1 J10.2 Q22.3 | length 10.7
  Top Layer w0.8: D62.1@9.5,-75 9.5,-80.75 J10.2@10.5,-81.75
  Bottom Layer w0.8: J10.2@10.5,-81.75 Q22.3@10.5,-78.2
OUT_3: D63.1 J10.3 Q23.3 | length 11.1
  Top Layer w0.8: D63.1@13.5,-75 13.5,-79.75 J10.3@15.5,-81.75
  Bottom Layer w0.8: J10.3@15.5,-81.75 Q23.3@15.5,-78.2
OUT_4: D64.1 J11.1 Q24.3 | length 11.5
  Top Layer w0.8: D64.1@17.5,-75 17.5,-78.75 J11.1@20.5,-81.75
  Bottom Layer w0.8: J11.1@20.5,-81.75 Q24.3@20.5,-78.2
OUT_5: D65.1 J11.2 Q25.3 | length 12
  Top Layer w0.8: D65.1@21.5,-75 21.5,-77.75 J11.2@25.5,-81.75
  Bottom Layer w0.8: J11.2@25.5,-81.75 Q25.3@25.5,-78.2
OUT_6: D66.1 J11.3 Q26.3 | length 12.4
  Top Layer w0.8: D66.1@25.5,-75 25.5,-76.75 J11.3@30.5,-81.75
  Bottom Layer w0.8: J11.3@30.5,-81.75 Q26.3@30.5,-78.2
OUT_7: D67.1 J12.1 Q27.3 | length 12.8
  Top Layer w0.8: D67.1@29.5,-75 29.5,-75.75 J12.1@35.5,-81.75
  Bottom Layer w0.8: J12.1@35.5,-81.75 Q27.3@35.5,-78.2
OUT_8: D68.1 J12.2 Q28.3 | length 13.3
  Top Layer w0.8: D68.1@33.5,-75 40.25,-81.75 J12.2@40.5,-81.75
  Bottom Layer w0.8: J12.2@40.5,-81.75 Q28.3@40.5,-78.2
OUT_9: D69.1 J13.1 Q29.3 | length 21.2
  Top Layer w0.8: J13.1@58,-81.75 62.5,-77.25 71,-77.25 72.25,-76 D69.1@72.25,-75
  Bottom Layer w0.8: J13.1@58,-81.75 Q29.3@58,-78.2
OUT_10: D70.1 J13.2 Q30.3 | length 18.9
  Top Layer w0.8: J13.2@63,-81.75 66.25,-78.5 73.5,-78.5 D70.1@76,-76
  Bottom Layer w0.8: J13.2@63,-81.75 Q30.3@63,-78.2
OUT_11: D71.1 J13.3 Q31.3 | length 18.7
  Top Layer w0.8: J13.3@68,-81.75 70,-79.75 75,-79.75 77.75,-77 78.75,-77 79.75,-76 D71.1@79.75,-75
  Bottom Layer w0.8: J13.3@68,-81.75 Q31.3@68,-78.2
OUT_12: D72.1 J14.1 Q32.3 | length 16.8
  Top Layer w0.8: J14.1@73,-81.75 75,-81.75 78.25,-78.5 80,-78.5 D72.1@83.5,-75
  Bottom Layer w0.8: J14.1@73,-81.75 Q32.3@73,-78.2
OUT_13: D73.1 J14.2 Q33.3 | length 16
  Top Layer w0.8: J14.2@78,-81.75 79,-81.75 81.75,-79 84,-79 87.25,-75.75 D73.1@87.25,-75
  Bottom Layer w0.8: J14.2@78,-81.75 Q33.3@78,-78.2
OUT_14: D74.1 J14.3 Q34.3 | length 14.3
  Top Layer w0.8: J14.3@83,-81.75 84.25,-81.75 D74.1@91,-75
  Bottom Layer w0.8: J14.3@83,-81.75 Q34.3@83,-78.2
OUT_15: D75.1 J15.1 Q35.3 | length 13.1
  Top Layer w0.8: J15.1@88,-81.75 D75.1@94.75,-75
  Bottom Layer w0.8: J15.1@88,-81.75 Q35.3@88,-78.2
OUT_16: D76.1 J15.2 Q36.3 | length 12.6
  Top Layer w0.8: J15.2@93,-81.75 98.5,-76.25 D76.1@98.5,-75
  Bottom Layer w0.8: J15.2@93,-81.75 Q36.3@93,-78.2
OUT_GND: J12.3 J15.3 Q21.2 Q22.2 Q23.2 Q24.2 Q25.2 Q26.2 Q27.2 Q28.2 Q29.2 Q30.2 Q31.2 Q32.2 Q33.2 Q34.2 Q35.2 Q36.2 R101.1 R102.1 R103.1 R104.1 R105.1 R106.1 R107.1 R108.1 R109.1 R110.1 R111.1 R112.1 R113.1 R114.1 R115.1 R116.1 | length 281.8
  Bottom Layer w0.2: Q21.2@6.45,-75.8 Q21.2@6.5,-75.75
  Bottom Layer w0.8: R101.1@6.5,-73.5 6.45,-73.55 Q21.2@6.45,-75.8 8,-77.35 8,-84.5 8.25,-84.75 ; R102.1@11.5,-73.5 11.5,-75.75 Q22.2@11.45,-75.8 13,-77.35 13,-85 ; R103.1@16.5,-73.5 16.5,-75.75 Q23.2@16.45,-75.8 18,-77.35 18,-84.75 ; R104.1@21.5,-73.5 21.5,-75.75 Q24.2@21.45,-75.8 23,-77.35 23,-84.75 ; R105.1@26.5,-73.5 26.45,-73.55 Q25.2@26.45,-75.8 28,-77.35 28,-84.75 ; R106.1@31.5,-73.5 31.45,-73.55 Q26.2@31.45,-75.8 33,-77.35 33,-84.75 ; R107.1@36.5,-73.5 36.45,-73.55 Q27.2@36.45,-75.8 38,-77.35 38,-84.75 ; R108.1@41.5,-73.5 41.45,-73.55 Q28.2@41.45,-75.8 45.5,-79.85 J12.3@45.5,-81.75 ; R109.1@59,-73.5 58.95,-73.55 58.95,-76.7 60.5,-78.25 60.5,-84.75 ; R110.1@64,-73.5 63.95,-73.55 63.95,-76.95 65.5,-78.5 65.5,-84.75 ; R111.1@69,-73.5 68.5,-74 68.5,-75.5 68.8,-75.8 Q31.2@68.95,-75.8 70.5,-77.35 70.5,-84.75 ; R112.1@74,-73.5 73.95,-73.55 Q32.2@73.95,-75.8 75.5,-77.35 75.5,-84.75 ; R113.1@79,-73.5 78.95,-73.55 Q33.2@78.95,-75.8 80.5,-77.35 80.5,-84.75 ; R114.1@84,-73.5 83.95,-73.55 Q34.2@83.95,-75.8 85.5,-77.35 85.5,-84.75 ; R115.1@89,-73.5 88.95,-73.55 Q35.2@88.95,-75.8 90.5,-77.35 90.5,-84.75 ; R116.1@94,-73.5 93.95,-73.55 93.95,-76.2 98,-80.25 J15.3@98,-81.75
  Bottom Layer w2: 8.25,-84.75 42.5,-84.75 J12.3@45.5,-81.75 48.5,-84.75 96.25,-84.75 98,-83 J15.3@98,-81.75
RS_485_A: J17.27 J18.4 | length 32.8
  Bottom Layer w0.3: J17.27@92.54,-64 94.04,-62.5 95.5,-62.5 96.4,-63.4 96.4,-64.9 98,-66.5 105,-66.5 108.75,-70.25 112.5,-70.25 115.81,-73.56 J18.4@115.81,-77
RS_485_B: J17.28 J18.3 | length 25
  Bottom Layer w0.3: J17.28@95.08,-64 95.08,-65.58 96.75,-67.25 104.5,-67.25 106.743,-69.493 108.5,-71.25 111.75,-71.25 114.54,-74.04 J18.3@114.54,-74.5
S_LED1: JP2.19 R28.1 | length 108.2
  Top Layer w0.3: R28.1@32.5,-46.5 32.5,-45.5 v2(33,-45) ; v1(50.25,-41) 51.5,-42.25 69.25,-42.25 70,-43 78,-43 79.75,-44.75 103.75,-44.75 105.5,-43 105.5,-35.25 107,-33.75 107,-30.5 106.5,-30 106.5,-26.75 108,-25.25 113.75,-25.25 115.86,-23.14 JP2.19@115.86,-21
  Bottom Layer w0.3: v2(33,-45) 40.25,-45 44.25,-41 v1(50.25,-41)
TCK: J17.34 JP3.9 JP3.11 | length 45.1
  Bottom Layer w0.3: J17.34@110.32,-64 113.82,-67.5 131.25,-67.5 139.5,-75.75 139.5,-82.05 JP3.11@140.7,-83.25 JP3.9@137.66,-83.25
TDI: J17.32 JP3.5 | length 43.9
  Bottom Layer w0.3: J17.32@105.24,-64 107.283,-66.043 110.24,-69 130.75,-69 133.858,-72.108 134.4,-72.65 134.4,-81.93 JP3.5@133.08,-83.25
TDO: J17.35 JP3.13 | length 42.2
  Bottom Layer w0.3: J17.35@112.86,-64 115.61,-66.75 131.5,-66.75 144.5,-79.75 144.5,-81.99 JP3.13@143.24,-83.25
TMS: J17.33 JP3.7 | length 43
  Bottom Layer w0.3: J17.33@107.78,-64 112.03,-68.25 131,-68.25 135.897,-73.147 136.9,-74.15 136.9,-81.97 JP3.7@135.62,-83.25
USB_DET: J16.23 JP1.19 | length 35.6
  Top Layer w0.3: JP1.19@51.61,-21 51.61,-24.36 v2(51.75,-24.5)
  Bottom Layer w0.3: v2(51.75,-24.5) 52.2,-24.95 79.33,-24.95 J16.23@82.38,-28
USB_PUP: J16.22 JP1.20 | length 37.5
  Top Layer w0.3: v2(50.5,-24.75) 50.375,-24.625 50.375,-19.695 JP1.20@51.61,-18.46
  Bottom Layer w0.3: v2(50.5,-24.75) 51.3,-25.55 77.39,-25.55 J16.22@79.84,-28
VCC3V3: C1.1 C4.1 C10.1 C11.1 C12.1 J16.1 J16.2 J16.3 J16.4 JP2.1 JP2.17 JP3.1 JP3.2 R27.2 R30.2 R31.2 R32.2 R33.2 R34.2 R35.2 R36.2 R37.2 R38.2 R39.2 R40.2 R41.2 R42.2 R43.2 R44.2 R45.2 R46.2 R47.2 R48.2 R49.2 R50.2 R51.2 R52.2 R53.2 R58.2 R59.2 R80.2 R99.2 U23.2 U23.4 U25.0 U25.2 U25.4 U26.4 U27.4 U31.1 U32.1 U33.1 U34.1 U35.1 U36.1 U37.1 U38.1 U39.1 U40.1 U41.1 U42.1 U43.1 U44.1 U45.1 U46.1 | length 592.3
  Top Layer w0.3: 8.5,-56.75 U32.1@8.5,-54.75 ; 12.75,-56.75 U33.1@12.75,-54.75 ; 17,-56.75 U34.1@17,-54.75 ; 21.25,-56.75 U35.1@21.25,-54.75 ; 25.5,-56.75 U36.1@25.5,-54.25 ; 29.75,-56.75 U37.1@29.75,-54.25 ; 33.5,-56.75 34,-56.25 U38.1@34,-54.25 ; U39.1@38.5,-68 38.5,-69 39,-69.5 42,-69.5 U40.1@42.75,-68.75 ; U43.1@63.5,-68.75 62.75,-69.5 60,-69.5 59.25,-68.75 U42.1@59.25,-68 57.75,-69.5 53.75,-69.5 52.25,-68 U41.1@47,-68 47,-69 46.5,-69.5 43.5,-69.5 U40.1@42.75,-68.75 ; U43.1@63.5,-68 63.5,-67.5 64.5,-66.5 67.25,-66.5 67.75,-67 U44.1@67.75,-68 68.75,-67 v1(69.75,-67) ; R45.2@87.75,-33.4 86.9,-33.4 86.25,-32.75 86.25,-26.75 87.5,-25.5 88.5,-25.5 JP2.1@93,-21 ; 104,-33.4 104,-26 105.75,-24.25 112.75,-24.25 113.32,-23.68 JP2.17@113.32,-21 ; v1(135.75,-44) v1@135.9,-44.15 ; R30.2@143,-44.4 R30.2@143.25,-44.15 ; v1(145.75,-46) v1@146,-45.75 ; U40.1@42.75,-68.75 U40.1@42.75,-68 U40.1@42.75,-68.75
  Top Layer w0.4: v1(35.5,-65.75) 35.4,-65.65 35.4,-62.35 36,-61.75 ; U45.1@115.25,-70.5 116.5,-71.75 119.75,-71.75 120.75,-70.75 120.75,-69.75 120.25,-69.25 117.75,-69.25 117,-68.5 117,-67 117.75,-66.25 120.75,-66.25 U46.1@125,-70.5 127.75,-67.75 127.75,-64 123.5,-59.75 v1(115.25,-59.75) ; C11.1@134.75,-58.25 134.75,-52.75 135.5,-52 138.25,-52 139.75,-50.5 139.75,-46.25 v1(140.5,-45.5) ; C12.1@148,-58.25 148,-52.75 U27.4@148.75,-52 ; v1(149,-46) 147.75,-47.25 147.75,-51 U27.4@148.75,-52 ; U27.4@149.85,-52 U27.4@148.75,-52
  Top Layer w0.8: U31.1@4.25,-54.75 4.25,-55.75 5.25,-56.75 33.5,-56.75 36,-59.25 36,-61.75
  Top Layer w1: J16.1@26.5,-28 J16.2@29.04,-28 J16.3@31.58,-28 J16.4@34.12,-28 34.12,-28.12 39.4,-33.4 39.9,-33.4 R31.2@41.5,-33.4 R44.2@74,-33.4 75.1,-34.5 77.75,-34.5 C4.1@78.75,-33.5 81,-33.5 82.5,-35 82.5,-38.5 84.55,-40.55 U23.2@85.75,-40.55 85.76,-40.54 U25.2@102.5,-40.54 ; R40.2@63.4,-33.4 63.075,-33.725 C1.1@63.075,-37.75 C1.1@63.575,-37.25 ; R45.2@87.75,-33.5 87.85,-33.4 R52.2@105.25,-33.4 ; R49.2@97.75,-33.4 97.75,-37 101.29,-40.54 ; U25.0@120.28,-40.54 125,-45.26 125,-57 133.6,-65.6 133.6,-72.9 132.5,-74 127.5,-74 126.5,-75 126.5,-79.21 JP3.2@128,-80.71 JP3.1@128,-83.25 ; v1(135.75,-44) 137.6,-44 R58.2@137.75,-44.15 ; v1(140.5,-45.5) R59.2@140.5,-44.15 ; v1(143,-45.5) 143.25,-45.25 R30.2@143.25,-44.15 ; v1(145.75,-46) 146,-45.75 R53.2@146,-44.15 ; v1(149,-46) R99.2@149,-44.15 R80.2@151.75,-44.15
  Bottom Layer w0.3: v1(35.5,-65.75) 36.5,-66.75 51,-66.75 v1(53.5,-69.25) ; 70.5,-66 87.75,-66 88.75,-65 88.75,-62.5 91.5,-59.75 v1(115.25,-59.75) 120.28,-54.72 U25.0@120.28,-40.54 U25.0@120.49,-40.75
  Bottom Layer w1: v1@69.75,-66.75 70.5,-66 ; U25.2@102.5,-40.54 U25.0@120.28,-40.54 132.29,-40.54 v1(135.75,-44) 139,-44 v1(140.5,-45.5) 145.25,-45.5 v1(145.75,-46) v1(149,-46)
  Bottom Layer w2: J16.4@34.12,-28 34.12,-29.62 38.75,-34.25 86.05,-34.25 v1(88.3,-36.5)
  other v1: 115,-55 117.5,-55 120,-55 122.5,-55 125,-55 115,-52.5 117.25,-52.5 119.75,-52.5 122.25,-52.5 125,-52.5 115,-50 117.5,-50 120,-50 122.5,-50 125,-50 115,-47.5 117.5,-47.5 120,-47.5 122.5,-47.5 125,-47.5 95.5,-40.3 98,-40.3 95.5,-38.5 98,-38.5 90.5,-36.5 93,-36.5 95.5,-36.5 98,-36.5
VCC5: C2.1 C5.1 C9.1 JP4.1 L1.2 R24.2 U23.3 U25.3 | length 169.6
  Top Layer w0.8: R24.2@26.15,-31.25 34.75,-31.25 37.3,-33.8 L1.2@37.3,-35.75
  Top Layer w1: U23.3@85.75,-42.85 86.4,-43.5 102.08,-43.5 U25.3@102.5,-43.08 ; v4(112.75,-48.5) 112.75,-57.25 113.75,-58.25 123.75,-58.25 130.75,-65.25 JP4.1@130.75,-72
  Top Layer w2: C9.1@8.5,-47.25 21,-47.25 27.25,-41 28,-40.25 ; 27.679,-40.571 28,-40.25 ; C5.1@79.25,-41 79.375,-41.125 81.241,-42.991 U23.3@85.891,-42.991 ; C5.1@79.5,-41 72.5,-41 69.25,-37.75 C2.1@68.425,-37.75 68.425,-38.575 66.25,-40.75 53.25,-40.75 48.25,-35.75 32.5,-35.75 28,-40.25
  Bottom Layer w1: U25.3@102.5,-43.08 102.58,-43 107.25,-43 v4(112.75,-48.5)
VCC24: D61.2 D62.2 D63.2 D64.2 D65.2 D66.2 D67.2 D68.2 D69.2 D70.2 D71.2 D72.2 D73.2 D74.2 D75.2 D76.2 F1.1 F1.3 J1.3 R81.2 R82.2 R83.2 R84.2 R85.2 R86.2 R87.2 R88.2 R89.2 R90.2 R91.2 R92.2 R93.2 R94.2 R95.2 R96.2 | length 356.6
  Top Layer w0.4: D67.2@29.5,-70.7 29.5,-68.5 v1(30,-68) ; D68.2@33.5,-70.7 D68.2@34.2,-70 ; D69.2@72.25,-70.7 D69.2@72.5,-70.45 ; v1(79.5,-69) 79.5,-70.45 D71.2@79.75,-70.7
  Top Layer w0.8: 101.2,-70.7 103.05,-70.7 103.1,-70.65 R96.2@103.1,-68.25
  Top Layer w1: R81.2@3,-67.65 R82.2@5.5,-67.65 R83.2@8,-67.65 R84.2@10.5,-67.65 R85.2@13,-67.65 R86.2@15.5,-67.65 ; R86.2@15.5,-67.75 R87.2@18,-67.75 ; R87.2@18,-67.65 R88.2@20.5,-67.65
  Top Layer w1.5: D61.2@5.5,-70.7 D62.2@9.5,-70.7 D63.2@13.5,-70.7 D64.2@17.5,-70.7 D68.2@33.5,-70.7 ; R88.2@20.5,-67.65 21.5,-68.65 D65.2@21.5,-70.7 22.75,-69.45 v6(22.75,-68.25) ; D69.2@72.25,-70.7 D70.2@76,-70.7 D72.2@83.5,-70.7 D73.2@87.25,-70.7 D74.2@91,-70.7 D75.2@94.75,-70.7 D76.2@98.75,-70.7
  Top Layer w2: 3.5,-84.75 2.25,-83.5 2.25,-73.45 5,-70.7 D61.2@5.5,-70.7 D61.2@5.5,-70.75 ; 3.625,-84.625 3.75,-84.75 100.25,-84.75 102,-83 102,-78.75 ; D76.2@98.75,-70.7 101.2,-70.7 102.1,-71.6 102.1,-78.75
  Bottom Layer w0.3: v1(30,-68) 31.6,-68 R89.2@34.6,-71
  Bottom Layer w0.4: R94.2@67.1,-71 R94.2@67.1,-70.4
  Bottom Layer w0.6: R90.2@39.6,-71 39.6,-69.9 40.25,-69.25 48.75,-69.25 50.5,-71 R92.2@57.1,-71 57.1,-69.9 58.75,-68.25 70.5,-68.25 71.5,-67.25 77.75,-67.25 v1(79.5,-69) ; 44.75,-69.25 44.85,-69.35 R91.2@44.85,-71 ; R93.2@62.1,-71 62.1,-68.4 62.25,-68.25 ; R94.2@67.1,-71 67.1,-68.4 67.25,-68.25
  Bottom Layer w2: J1.3@5.5,-5 2.25,-8.25 2.25,-30 5.5,-33.25 F1.3@5.75,-33.5 5.75,-49.25 3.5,-51.5 3.5,-54 3.5,-55 8.5,-60 13.25,-60 21.5,-68.25 v6(22.75,-68.25)
pads on no net: J18.0 J18.1 J18.6 JP3.17 JP3.19 U24.2

## Polygon pours and split planes (outlines as drawn)
VCC24 on Top Layer (hatched 90Degree grid 0 track 0.2, remove dead copper): 103.75,-77.5 103.75,-68 74.25,-68 74.25,-70.7 81.75,-70.7 81.75,-72.5 100.25,-72.5 100.5,-72.25 100.5,-77.7 103.75,-77.7
VCC24 on Top Layer (hatched 90Degree grid 0 track 0.2, remove dead copper): 100.75,-77.5 103.75,-77.5 103.75,-86 0.5,-86 0.5,-72.25 3.5,-72.25 3.5,-67.65 32.25,-67.65 32.25,-70.7 33.5,-70.7 33.5,-72.75 4,-72.75 2.75,-74 2.75,-83.25 3.75,-84.25 100.25,-84.25 100.25,-77.5
NetD25_1 on Top Layer (hatched 90Degree grid 0 track 0.2, remove dead copper): 17.5,-41.5 24,-41.5 27.75,-37.75 27.75,-35.5 25.75,-35.5 25.75,-37.75 23.5,-40 17.5,-40
VCC3V3 on Top Layer (hatched 90Degree grid 0 track 0.2, remove dead copper): 87.5,-40.54 87.5,-33.4 104.5,-33.4 104.5,-40.5 102.5,-40.5 101.5,-41.5 87.5,-41.5
GND on Top Layer (hatched 90Degree grid 0 track 0.2, remove dead copper): 10.5,-5 10.5,-10.5 2,-10.5 2,-7.3 9,-7.3 9,-5
GND on Top Layer (hatched 90Degree grid 0 track 0.2, remove dead copper): 11.5,-45.5 20,-45.5 23,-42.5 19.5,-42.5 19.5,-43.5 14.5,-43.5 14.5,-38.5 8.25,-38.5 8.25,-40 6.75,-41.5 6.75,-45.5 11.5,-45.5
GND on Top Layer (hatched 90Degree grid 0 track 0.2, remove dead copper): 6.5,-45.5 6.5,-50 1,-50 1,-1 13.25,-1 13.25,-17.5 10,-17.5 8.5,-16 8.5,-3 3.5,-3 3.5,-41.5 6.5,-41.5
OUT_GND on Bottom Layer (hatched 90Degree grid 0 track 0.2, remove dead copper): 6.5,-86 6.5,-83.75 43.435,-83.75 45.435,-81.75 47.435,-83.75 97.25,-83.75 97.25,-81.5 99.75,-81.5 99.75,-86
IN_GND on Bottom Layer (hatched 90Degree grid 0 track 0.2, remove dead copper): 109.3,-11.25 103,-11.25 103,-1.5 108.25,-1.5 108.25,-9 109.5,-9 109.5,-11 109.3,-11.2
IN_GND on Bottom Layer (hatched 90Degree grid 0 track 0.2, remove dead copper): 108.24,-21 108.24,-18.46 110.78,-18.46 110.78,-21
VCC3V3 on Bottom Layer (hatched 90Degree grid 0 track 0.2, remove dead copper): 106,-59.75 92,-59.75 92,-66.5 69.75,-66.5 69.75,-66.75 56,-66.75 56,-69.5 52.5,-69.5 50.5,-67.5 37,-67.5 35.5,-66 35.5,-65.5 88.75,-65.5 88.75,-55 107.1,-55 107.1,-59.75
VCC3V3 on Bottom Layer (hatched 90Degree grid 0 track 0.2, remove dead copper): 102.5,-40.54 100.5,-40.54 100.5,-38.5 97,-35 85.5,-35 85.5,-51 102.5,-51 106,-54.5 106,-59.75 125.5,-59.75 125.5,-31.5 110,-31.5 110,-35.5 104.96,-40.54
GND on Bottom Layer (hatched 90Degree grid 0 track 0.4, remove dead copper): 14,-44.7 28,-44.7 35.7,-37 51,-37 54.5,-40.5 80,-40.5 80,-31 26,-31 26,-39.75 15.363,-39.75 14.114,-38.5 14.114,-44.7
GND on Bottom Layer (hatched 90Degree grid 0 track 0.2, remove dead copper): 12.75,-30.25 14.25,-31.75 20.5,-31.75 22.25,-30 22.25,-27.75 23.5,-27.75 23.5,-36.5 21.75,-36.5 21.75,-39.25 12.5,-39.25 12.5,-30.25
GND on Bottom Layer (hatched 90Degree grid 0 track 0.4, remove dead copper): 23,-36.5 15,-36.5 15,-49 10,-49 10,-45.5 8,-45.5 8,-30.5 5.5,-30.5 5.5,-25.5 8,-25.5 8,-1 12,-1 12,-12.25 12.5,-12.25 12.5,-14.5 18,-20 18,-23 13.5,-23 13.5,-33 23,-33

## Keep-outs
Keep-Out Layer:
  the board outline again, w0

## Other copper
Top Layer:
  rectangle net VCC3V3: 123.25,-46.5 126.25,-35
  rectangle net VCC3V3: 114,-56.75 126.25,-45.75
  rectangle net VCC3V3: 87.5,-42.5 101,-41.3
  rectangle net VCC3V3: 87.5,-42.5 90.5,-38.1
  rectangle net VCC3V3: 94.1,-42.5 94.9,-38.5
  rectangle net VCC3V3: 89.9,-38.9 94.45,-38.1
  rectangle net GND: 1.75,-30.5 9.5,-25.25
  rectangle net GND: 1.75,-3 13.25,-1.25
  rectangle net GND: 22.75,-33.75 34.5,-32.5
  rectangle net GND: 22.5,-36.75 24.75,-32.85
  rectangle net GND: 8,-45.5 11.5,-22.5
  rectangle net GND: 8.25,-38.75 16.5,-31.75

## Silkscreen, mask and mechanical layers (free items; w line width, h text height)
Top Overlay:
  rectangle: 48.25,-14.5 55.25,-13
  rectangle: 50.25,-13 53.25,-1
  rectangle: 100.75,-14.5 107.75,-13
  rectangle: 102.75,-13 105.75,-1
  rectangle: 0.5,-14 2.5,-12
  rectangle: 153.5,-14 155.5,-12
  rectangle: 0.5,-74.75 2.5,-72.75
  rectangle: 153.5,-74.75 155.5,-72.75
  region: 55.25,-72.25 48.25,-72.25 48.25,-73.75 55.25,-73.75
  region: 53.25,-73.75 50.25,-73.75 50.25,-85.75 53.25,-85.75
  region: 107.75,-72.25 100.75,-72.25 100.75,-73.75 107.75,-73.75
  region: 105.75,-73.75 102.75,-73.75 102.75,-85.75 105.75,-85.75
  lines w0.254: 23.5,-67 23.5,-25 133.5,-25 133.5,-67 23.5,-67
  text "ANALOGUE INPUTS" at 139,-19.25 h1
  text "GND" at 138,-61 h1
  text "GND" at 146,-65.25 h1
  text "JTAG" at 136.25,-76.75 h2
Bottom Overlay:
  text "OSPLC 2.2 IO Board" at 87.75,-57.5 h2
  text "StartingElectronics.com" at 87,-59.25 h1.2
  text "Large Brick Open Source PLC" at 87,-61.5 h1.2
Drill Drawing:
  text ".LEGEND" at 160.58,-81.62 h1.52
  text "Drill Drawing." at 160.58,-84.16 h1.52

## Dimensions
0,-87 to 156,-86.5 on Mechanical 1
0,-86.5 to 0,0 on Mechanical 1